# Altium PCB Dev Board.PcbDoc (part 2 of 2)
Units mm, origin at the board's own origin, x right, y up, seen from the top; angles counter-clockwise.
Board outline 100 x 100 mm, 4 copper layers (Top Layer, GND, 3V3, Bottom Layer), stack 0.603 mm thick; 110 components, 66 nets, 337 pads, 152 vias.
Unrouted connection lines stored in the file: 23.
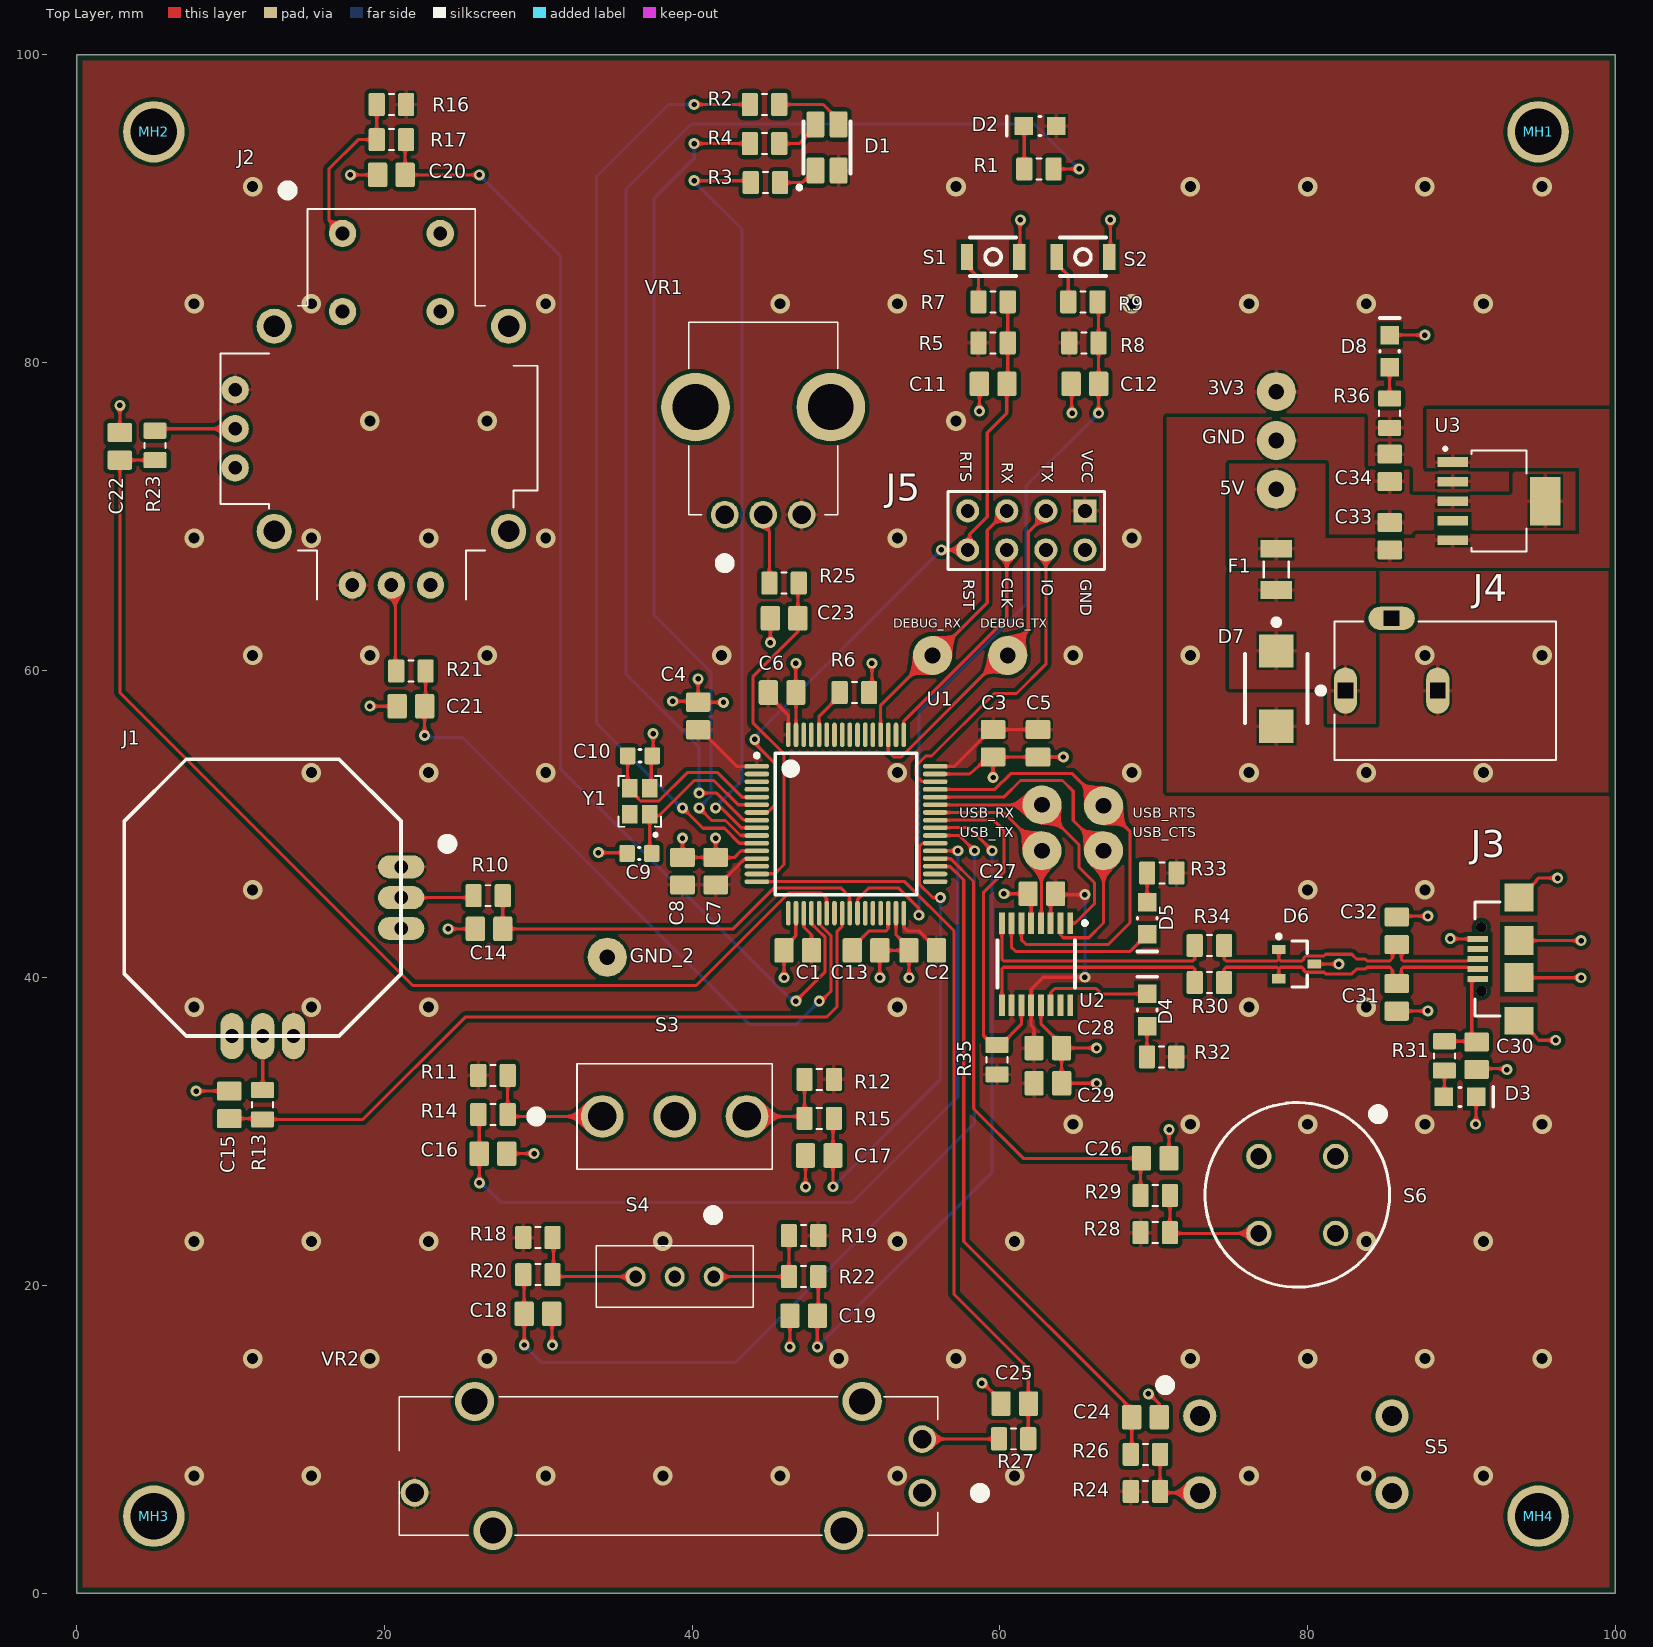
[diagram p0: Top Layer view]

## Part data (continued)
U2: Manufacturer 1="FTDI, Future Technology Devices International Ltd", Manufacturer Part Number 1=FT230XS-R, Supplier Part Number 1=768-1135-1-ND, Supplier 1=Digi-Key
U3: library part CMP-0395-00300-2, "IC REG LINEAR 3.3V 1A SOT223-6", Manufacturer="Texas Instruments", Rating=Catalog, Supplier Part Number 1=296-22681-2-ND, Accuracy(%)=3, DatasheetVersion=SBVS067O, Eco-Plan="Green (RoHS & no Sb/Br)", Fixed Output Options(V)=3.3, Iout(Max)(A)=1, Iq(Typ)(mA)=0.3, Manufacturer 1="Texas Instruments", Manufacturer Part Number 1=TPS73733DCQR, Mounting Technology="Surface Mount", PackageDescription="6-Pin Plastic Small Outline, Body 3.5 x 6.5 mm, Pitch 1.27 mm", PackageReference=DCQ0006A, PackageVersion=4202109/D, PartNumber=TPS73733DCQR, SubFamily="Single Channel LDO", Supplier 1=Digi-Key, Vdo(Typ)(mV)=130, Vin(Max)(V)=5.5, Vin(Min)(V)=2.2, Vout Adj(Max)(V)=3.3, Vout Adj(Min)(V)=3.3
VR1: "POT 10K OHM 1/20W CARBON LINEAR", Manufacturer 1=Bourns, Manufacturer Part Number 1=PTV09A-4020F-B103, Max Operating Temperature=50°C, Max Power Dissipation=50mW, Min Operating Temperature=-10°C, Package Quantity=100, Resistance=10kR, Supplier Part Number 1=PTV09A-4020F-B103-ND, Tolerance=20%, Voltage Rating=20V, Actuator Diameter=0.236inch, Actuator Length=0.787inch, ComponentLink1Description=https://datasheet.ciiva.com/6249/ptv09-6249579.pdf?src-supplier=Digi-Key, ComponentLink1URL=https://datasheet.ciiva.com/6249/ptv09-6249579.pdf?src-supplier=Digi-Key, ComponentLink2Description=https://datasheet.ciiva.com/11831/0900766b80fa58ec-11831036.pdf?src-supplier=RSComponents, ComponentLink2URL=https://datasheet.ciiva.com/11831/0900766b80fa58ec-11831036.pdf?src-supplier=RSComponents, ComponentLink3Description=https://datasheet.ciiva.com/6249/ptv09-6249723.pdf?src-supplier=Digi-Key, ComponentLink3URL=https://datasheet.ciiva.com/6249/ptv09-6249723.pdf?src-supplier=Digi-Key, ComponentLink4Description=https://datasheet.ciiva.com/30228/24ptv09-30228045.pdf?src-supplier=Onlinecomponents.com, ComponentLink4URL=https://datasheet.ciiva.com/30228/24ptv09-30228045.pdf?src-supplier=Onlinecomponents.com, Composition=Carbon, Depth=12.5mm, Length=11.4mm, Military Standard=Not, Mount="Through Hole,Snap in,Brackets", Number of Gangs=1, Number of Turns=1, Packaging=Bulk, Power Rating=50mW, Pricing 1="1=0.83000, 10=0.74400, 25=0.67200, 50=0.64800, 100=0.61200, 250=0.58800, 500=0.55200, 1000=0.45600, 5000=0.37200 (USD)", Radiation Hardening=No, REACH SVHC="No SVHC", RoHS=Yes, Stock 1=629, Supplier 1=Digi-Key, Taper=Linear, Termination=Pin, Type=Potentiometer, Voltage Rating (DC)=20V
VR2: "SLIDE POT 10K OHM 0.1W TOP 20MM", Manufacturer 1=Bourns, Manufacturer Part Number 1=PTA2043-2015DPB103, Max Operating Temperature=50°C, Max Power Dissipation=100mW, Min Operating Temperature=-10°C, Package Quantity=100, Power Rating=50mW, Resistance=10kR, Supplier Part Number 1=PTA2043-2015DPB103-ND, Tolerance=20%, ComponentLink1Description=https://datasheet.ciiva.com/6248/pta-6248511.pdf?src-supplier=Digi-Key, ComponentLink1URL=https://datasheet.ciiva.com/6248/pta-6248511.pdf?src-supplier=Digi-Key, Composition=Potentiometer, Depth=9mm, Height=0.256inch, Hole Diameter=1.2mm, Length=35mm, Military Standard=Not, Mount="Through Hole", Number of Turns=1, Packaging=Bulk, Pricing 1="1=1.29000, 10=1.14000, 25=1.02600, 50=0.98800, 100=0.95000, 250=0.89300, 500=0.76000, 1000=0.70300, 5000=0.57760 (USD)", Radiation Hardening=No, RoHS=Yes, Stock 1=927, Supplier 1=Digi-Key, Taper=Linear, Termination=Pin, Type=Potentiometer, Width=0.354inch
Y1: "CRYSTAL 25.0000MHZ 12PF SMD", Case/Package=SMD/SMT, ESR (Equivalent Series Resistance)=80R, Frequency=25MHz, Frequency Stability=15ppm, Frequency Tolerance=10ppm, Load Capacitance=12pF, Manufacturer 1="Kyocera AVX", Manufacturer Part Number 1=CX2520DB25000H0FLJC1, Max Operating Temperature=85°C, Min Operating Temperature=-30°C, Ratings=AEC-Q200, Supplier Part Number 1=1253-1724-1-ND, ComponentLink1Description=https://media.digikey.com/pdf/Data%20Sheets/AVX%20PDFs/CX2520DB_USY1M-H1-16429-00_Spec.pdf?src-supplier=Digi-Key, ComponentLink1URL=https://media.digikey.com/pdf/Data%20Sheets/AVX%20PDFs/CX2520DB_USY1M-H1-16429-00_Spec.pdf?src-supplier=Digi-Key, Height=0.022inch, Length=0.098inch, Mount="Surface Mount", Packaging="Tape and Reel", Pricing 1="1=0.72000, 10=0.63300, 50=0.59120, 100=0.52250, 500=0.49500, 1000=0.41250 (USD)", RoHS=Yes, Stock 1=11741, Supplier 1=Digi-Key, Width=0.079inch

## Via types
v1: diameter 1.27, hole 0.711, Top Layer to Bottom Layer, 81 vias
v2: diameter 0.711, hole 0.356, Top Layer to Bottom Layer, 71 vias

## Nets (pads, with @x,y where several pads share a name; then routed paths per layer and width w, separated by ;. In a path a pad name is that pad's centre, name@x,y a point inside that pad or via, vN(x,y) a via of type N, cw(c..) or ccw(c..) an arc to the next point about the centre after c; other vN are vias at no path point)
3V3: 3V3.1 C1.2 C2.2 C3.2 C4.2 C5.2 C6.2 C7.2 C8.2 C27.2 C28.2 C29.2 C34.2 D1.4 D2.1 J1.1 J1.4 J2.H1 J2.V1 J5.1 R5.2 R8.2 R11.1 R12.1 R16.1 R18.1 R19.1 R24.1 R28.1 R32.2 R33.2 R35.2 R36.2 U1.1 U1.13 U1.19 U1.32 U1.48 U1.64 U2.3 U2.10 U2.12 U3.2 VR1.3 VR2.3 | length 42.5
  Top Layer w0.203: R16.1@21.402,96.544 R16.1 ; C4.2@40.259,56.128 40.519,56.128 42.897,53.75 U1.1 ; C7.2 C7.2@41.656,46.038 ; C7.2@41.783,46.355 42.037,46.355 43.432,47.75 U1.13 ; C6.2 44.952,58.377 46.25,57.079 U1.64 ; U1.19 47.269,44.181 47.269,43.282 47.758,42.793 C1.2 ; U1.32 53.769,44.181 53.769,43.259 53.975,43.053 54.737,43.053 55.886,41.904 C2.2 ; U1.48 57.052,53.75 59.442,56.14 C3.2 ; C3.2@59.69,56.14 C5.2 C5.2@62.611,56.14 ; C28.2 62.224,36.709 62.035,36.898 U2.12 62.035,39.259 62.813,40.037 v2(65.532,40.037) ; U2.3 63.305,45.021 C27.2@63.622,45.338 ; C27.2 63.691,45.402 v2(65.532,45.402)
  Bottom Layer w0.203: v2(65.532,40.037) v2(65.532,45.402)
  other v1: 7.62,7.62 15.24,7.62 30.48,7.62 38.1,7.62 45.72,7.62 53.34,7.62 60.96,7.62 76.2,7.62 83.82,7.62 91.44,7.62 11.43,15.24 19.05,15.24 26.67,15.24 49.53,15.24 57.15,15.24 72.39,15.24 80.01,15.24 87.63,15.24 95.25,15.24 7.62,22.86 15.24,22.86 22.86,22.86 38.1,22.86 53.34,22.86 60.96,22.86 83.82,22.86 91.44,22.86 64.77,30.48 72.39,30.48 80.01,30.48 87.63,30.48 95.25,30.48 7.62,38.1 15.24,38.1 22.86,38.1 53.34,38.1 76.2,38.1 83.82,38.1 11.43,45.72 80.01,45.72 87.63,45.72 15.24,53.34 22.86,53.34 30.48,53.34 53.34,53.34 68.58,53.34 11.43,60.96 19.05,60.96 26.67,60.96 41.91,60.96 64.77,60.96 7.62,68.58 15.24,68.58 22.86,68.58 30.48,68.58 53.34,68.58 68.58,68.58 19.05,76.2 26.67,76.2 57.15,76.2 7.62,83.82 15.24,83.82 30.48,83.82 45.72,83.82 53.34,83.82 68.58,83.82 76.2,83.82 83.82,83.82 91.44,83.82 11.43,91.44 57.15,91.44 72.39,91.44 80.01,91.44 87.63,91.44 95.25,91.44
5V: 5V.1 C33.1 F1.2 U3.1 U3.5
DEBUG_RX: DEBUG_RX.1 J5.3 U1.52 | length 18.1
  Top Layer w0.203: U1.52 52.25,57.711 55.181,60.642 55.435,60.642 59.182,64.389 59.182,69.088 J5.3
DEBUG_TX: DEBUG_TX.1 J5.2 U1.51 | length 22
  Top Layer w0.203: U1.51@52.769,55.819 U1.51 52.75,54.692 53.086,54.356 53.594,54.356 60.071,60.833 61.849,62.611 61.849,68.961 62.992,70.104 J5.2
GND: C1.1 C2.1 C3.1 C4.1 C5.1 C6.1 C7.1 C8.1 C9.1 C10.1 C11.1 C12.1 C13.1 C14.1 C15.1 C16.1 C17.1 C18.1 C19.1 C20.1 C21.1 C22.1 C23.1 C24.1 C25.1 C26.1 C27.1 C28.1 C29.1 C30.2 C31.2 C32.2 C33.2 C34.1 D3.2 D6.3 D7.2 D8.2 GND.1 GND_2.1 J1.3 J1.6 J2.B2A J2.H3 J2.V3 J3.5 J3.Shell J4.2 J5.5 R6.2 S1.2 S2.2 S3.2 S4.2 S5.1 S6.1 U1.12 U1.18 U1.31 U1.47 U1.63 U2.5 U2.13 U3.3 U3.6 VR1.1 VR2.1 Y1.2 | length 121.9
  Top Layer w0.203: C22.1@2.794,75.444 v2@2.794,77.215 ; v2(7.746,32.638) C15.1 ; v2(17.78,92.202) C20.1 ; v2(19.049,57.657) C21.1@20.822,57.658 ; v2(24.129,43.179) C14.1@25.902,43.18 ; C16.1 v2(29.718,28.575) ; C18.1@30.891,18.137 30.891,16.152 v2(30.914,16.128) ; v2(33.909,48.133) 35.557,48.133 35.687,48.003 C9.1 ; Y1.2@37.305,52.387 Y1.2 37.241,52.514 37.338,52.611 37.338,54.424 37.481,54.424 37.465,54.44 v2(37.465,55.88) ; v2(38.735,57.978) 40.325,57.978 C4.1 ; v2(39.37,49.085) C8.1 C7.1 v2(41.529,49.085) ; v2(40.386,59.436) C4.1 ; C7.1@41.826,48.145 41.826,48.09 42.1,47.816 42.735,47.816 43.17,48.25 U1.12 ; v2(42.037,57.912) 40.634,57.912 40.507,58.039 C4.1 ; C23.1 45.021,63.315 45.085,63.252 v2(45.085,61.785) ; v2(45.974,40.005) 45.971,40.008 45.971,41.78 C1.1 45.968,41.953 46.736,42.721 46.736,44.186 U1.18 ; v2(46.354,16.001) C19.1 ; v2(46.736,60.452) 46.736,58.553 C6.1 46.75,58.539 U1.63 ; C17.1@47.368,28.445 47.368,26.418 v2(47.37,26.415) ; R6.2 51.689,58.735 v2(51.689,60.452) ; v2(52.197,40.005) C13.1 C2.1 ; U1.31 53.25,42.804 54.096,41.958 C2.1 ; v2(54.102,40.005) 54.099,40.008 54.099,41.78 C2.1 ; U1.47 58.039,53.25 59.26,54.35 C3.1 ; C11.1 58.671,78.61 58.671,76.838 v2(58.674,76.835) ; v2(58.833,13.652) 58.928,13.652 60.071,12.509 C25.1 ; v2(59.563,53.023) 59.563,54.096 59.436,54.223 C3.1 ; v2(60.261,45.466) 61.583,45.466 61.71,45.339 C27.1 ; S1.2 61.302,86.907 61.302,89.242 v2(61.34,89.28) ; U2.5 C27.1@62.035,45.338 ; U2.13 62.67,37.025 C28.1@64.014,35.681 ; C28.1@64.017,35.43 64.017,33.15 C29.1 v2(66.294,33.147) ; C28.1@64.017,35.433 v2(66.294,35.433) ; v2(64.135,54.356) 62.49,54.356 C5.1 C3.1 ; C12.1 64.671,78.579 64.671,76.742 v2(64.705,76.708) ; S2.2@67.105,86.418 S2.2 67.183,86.946 v2(67.183,89.281) ; v2(69.659,12.954) 69.723,12.954 70.364,12.313 C24.1 ; C26.1@70.996,28.266 71,28.27 v2(71,30.138) ; D6.3 D6.3 82.04,40.892 v2(82.041,40.893) ; D8.2 v2(87.63,81.788) ; C31.2@85.897,37.839 87.825,37.839 v2(87.831,37.845) ; C32.2@85.896,44.008 87.699,44.008 v2@87.705,44.002 ; v2(89.281,42.545) 89.295,42.531 91.061,42.531 J3.5 ; v2(90.932,30.48) 90.966,30.514 D3.2 ; C30.2@90.995,34.099 92.9,34.099 v2(92.964,34.036) ; J3.Shell@93.75,37.217 93.8,37.217 94.883,36.135 94.883,36.085 95.027,35.941 v2(96.139,35.941) ; J3.Shell@93.75,40.017 93.762,40.005 v2(97.79,40.005) ; J3.Shell@93.751,42.418 v2(97.79,42.418) ; J3.Shell@93.75,45.217 93.8,45.217 94.871,46.288 94.871,46.338 95.015,46.482 v2(96.266,46.482)
  other v1: 76.2,53.34 83.82,53.34 91.44,53.34 72.39,60.96 87.63,60.96 95.25,60.96
  other v2: 87.832,44.008 2.793,77.215
NetC9_2: C9.2 U1.6 Y1.1 | length 11.3
  Top Layer w0.203: C9.2 37.241,48.211 Y1.1 37.241,50.724 37.419,50.546 37.846,50.546 40.132,52.832 41.402,52.832 42.984,51.25 U1.6
NetC10_2: C10.2 U1.5 Y1.3 | length 12.3
  Top Layer w0.203: C10.2 35.806,52.459 Y1.3 35.941,52.224 36.512,51.653 36.512,51.629 36.646,51.495 37.836,51.495 39.68,53.34 41.656,53.34 43.265,51.731 44.181,51.731 U1.5
NetC13_2: C13.2 U1.30 | length 4
  Top Layer w0.203: C13.2 50.407,41.953 51.507,43.053 52.615,43.053 52.731,43.17 52.731,44.181 U1.30
NetC14_2: C14.2 R10.2 U1.25 | length 27.1
  Top Layer w0.203: R10.2 27.686,43.186 C14.2 42.672,43.18 45.339,45.847 49.657,45.847 50.231,45.273 50.231,44.219 U1.25
NetC15_2: C15.2 R13.2 U1.24 | length 48.8
  Top Layer w0.203: C15.2 12.011,30.849 R13.2 18.603,30.795 25.273,37.465 30.861,37.465 48.768,37.465 49.403,38.1 49.403,42.997 49.75,43.344 U1.24 U1.24@49.731,44.219
NetC16_2: C16.2 R14.2 U1.37 | length 56.4
  Top Layer w0.203: R14.2 26.156,31.055 C16.2 26.162,28.569 v2(26.162,26.67) ; U1.37 55.81,48.26 v2(57.268,48.26)
  Bottom Layer w0.203: v2(26.162,26.67) 26.289,26.67 27.559,25.4 50.419,25.4 57.268,32.249 v2(57.268,48.26)
NetC17_2: C17.2 R15.2 U1.38 | length 31.1
  Top Layer w0.203: 49.155,26.796 C17.2 49.155,30.801 R15.2 ; U1.38 54.973,48.75 54.771,48.548 54.771,46.093 55.653,45.212 v2(56.134,45.212)
  Bottom Layer w0.203: v2(49.155,26.416) 56.134,33.395 v2(56.134,45.212)
NetC18_2: C18.2 R20.2 U1.39 | length 61.5
  Top Layer w0.203: R20.2 29.077,20.641 C18.2 29.083,18.155 v2(29.083,16.129) ; U1.39 57.366,49.251 v2(58.356,48.26)
  Bottom Layer w0.203: v2(29.083,16.129) 30.226,14.986 42.799,14.986 58.356,30.543 v2(58.356,48.26)
NetC19_2: C19.2 R22.2 U1.40 | length 45.9
  Top Layer w0.203: v2(48.133,16.002) 48.133,18.022 C19.2 48.199,18.088 R22.2 ; U1.40 55.817,49.767 57.993,49.767 v2(59.499,48.26)
  Bottom Layer w0.203: v2(48.133,16.002) 59.499,27.368 v2(59.499,48.26)
NetC20_2: C20.2 R17.2 U1.20 | length 76.4
  Top Layer w0.203: R17.2 21.342,94.428 C20.2 v2(26.162,92.202) ; v2(46.736,38.481) 48.641,40.386 48.641,42.633 48.102,43.171 48.093,43.171 47.75,43.515 U1.20
  Bottom Layer w0.203: v2(26.162,92.202) 31.432,86.931 31.433,53.594 46.545,38.481 v2(46.736,38.481)
NetC21_2: C21.2 R21.2 U1.21 | length 44.9
  Top Layer w0.203: v2(22.606,55.753) 22.606,57.906 22.672,57.972 R21.2 22.672,60.005 R21.2@22.606,60.071 ; U1.21 48.25,43.524 48.371,43.402 48.371,43.393 49.022,42.743 49.022,39.116 48.387,38.481 v2(48.26,38.481)
  Bottom Layer w0.203: v2@22.479,55.626 25.082,55.626 43.752,36.957 46.736,36.957 v2(48.26,38.481)
NetC22_2: C22.2 R23.2 U1.22 | length 74.8
  Top Layer w0.203: R23.2 5.074,73.654 C22.2 2.794,58.547 21.844,39.497 40.259,39.497 46.279,45.517 48.387,45.517 48.731,45.172 48.731,44.219 U1.22
NetC23_2: C23.2 R25.2 U1.15 | length 22.4
  Top Layer w0.203: U1.15 44.219,46.769 45.372,46.769 45.974,47.371 45.974,54.561 43.942,56.593 43.942,59.563 46.869,62.49 C23.2 46.869,65.599 R25.2
NetC24_2: C24.2 R26.2 U1.35 | length 44.5
  Top Layer w0.203: U1.35@55.473,47.231 55.499,47.205 55.544,47.25 U1.35 55.819,47.231 56.782,47.231 57.658,46.355 57.658,22.86 68.574,11.944 C24.2 68.574,9.128 68.469,9.023 R26.2
NetC25_2: C25.2 R27.2 U1.16 | length 49.5
  Top Layer w0.203: U1.16 53.826,46.25 57.023,43.053 57.023,19.431 61.849,14.605 61.849,12.331 C25.2 ; C25.2@61.751,12.336 61.849,12.238 R27.2 ; R27.2@61.783,10.033 R27.2@61.783,10.329
NetC26_2: C26.2 R29.2 U1.36 | length 32.6
  Top Layer w0.203: U1.36 56.806,47.75 58.293,46.263 58.293,31.496 61.526,28.263 C26.2 69.149,28.203 R29.2
NetD1_1: D1.1 R3.2 | length 2.8
  Top Layer w0.203: R3.2 47.149,91.694 48.031,92.575 D1.1@48.031,92.655
NetD1_2: D1.2 R4.1 | length 2.9
  Top Layer w0.203: R4.1 46.959,94.234 47.702,94.977 47.782,94.977 48.031,95.225 D1.2@48.031,95.305
NetD1_3: D1.3 R2.1 | length 4.7
  Top Layer w0.203: R2.1 48.514,96.774 49.257,96.031 49.257,95.633 49.506,95.385 D1.3@49.506,95.305
NetD2_2: D2.2 R1.2 | length 2.8
  Top Layer w0.203: D2.2 61.59,95.348 R1.2
NetD3_1: D3.1 R31.1 | length 1.7
  Top Layer w0.203: D3.1 88.9,32.292 R31.1
NetD4_1: D4.1 R32.1 | length 2
  Top Layer w0.203: R32.1 D4.1@69.561,36.84
NetD4_2: D4.2 U2.14 | length 7.3
  Top Layer w0.203: U2.14 63.305,39.048 63.562,39.305 66.258,39.305 66.604,38.958 D4.2
NetD5_1: D5.1 R33.1 | length 1.9
  Top Layer w0.203: R33.1 69.58,46.811 D5.1
NetD5_2: D5.2 U2.7 | length 11
  Top Layer w0.203: U2.7 60.75,43.545 60.75,41.993 61.023,41.719 68.472,41.719 D5.2
NetD7_1: D7.1 F1.1 J4.1
NetD8_1: D8.1 R36.1 | length 2
  Top Layer w0.203: R36.1 D8.1
NetJ1_2: J1.2 R10.1 | length 4.7
  Top Layer w0.203: J1.2 25.649,45.212 R10.1
NetJ1_5: J1.5 R13.1 | length 3.5
  Top Layer w0.203: R13.1 12.082,32.722 J1.5
NetJ2_B1A: J2.B1A R16.2 R17.1 | length 10.7
  Top Layer w0.203: J2.B1A 16.383,89.281 16.383,92.583 18.288,94.488 R17.1 R16.2
NetJ2_H2: J2.H2 R21.1 | length 5.7
  Top Layer w0.203: J2.H2 20.701,65.278 20.701,60.005 R21.1
NetJ2_V2: J2.V2 R23.1 | length 5.3
  Top Layer w0.203: R23.1 5.202,75.692 J2.V2
NetR6_1: R6.1 U1.60 | length 3.3
  Top Layer w0.203: U1.60 48.25,57.013 49.591,58.354 R6.1
NetR9_2: R9.2 S2.1 | length 3.5
  Top Layer w0.203: S2.1 63.705,86.418 64.45,85.673 R9.2 64.516,83.947 R9.2@64.516,84.111
NetR11_2: R11.2 R14.1 S3.1 | length 8.7
  Top Layer w0.203: R11.2 R14.1 28.133,30.988 S3.1
NetR12_2: R12.2 R15.1 S3.3 | length 6.3
  Top Layer w0.203: S3.3 47.178,30.988 R15.1 R12.2
NetR18_2: R18.2 R20.1 S4.3 | length 7.9
  Top Layer w0.203: R18.2 30.988,23.053 30.988,20.762 R20.1 31.054,20.574 S4.3
NetR19_2: R19.2 R22.1 S4.1 | length 7.6
  Top Layer w0.203: S4.1 R22.1 R19.2
NetR24_2: R24.2 R26.1 S5.3 | length 5
  Top Layer w0.203: R26.1 R24.2 70.511,6.522 S5.3
NetR25_1: R25.1 VR1.2 | length 4.6
  Top Layer w0.203: VR1.2 44.639,70.082 44.639,69.407 45.019,69.027 R25.1
NetR27_1: R27.1 VR2.2 | length 4.8
  Top Layer w0.203: VR2.2 59.648,10.014 R27.1@59.69,9.972
NetR28_2: R28.2 R29.1 S6.3 | length 8.2
  Top Layer w0.203: R29.1 R28.2 71.106,23.39 S6.3
NetR35_1: R35.1 U1.41 U2.11 | length 23.2
  Top Layer w0.203: U1.41 59.605,50.25 60.261,49.593 60.261,46.863 58.928,45.529 58.928,36.258 59.561,35.626 R35.1 60.047,35.626 61.4,36.979 U2.11
NetTP6_1: U1.42 U2.4 USB_TX.1 | length 13.3
  Top Layer w0.203: U1.42 60.248,50.75 62.492,48.506 62.492,48.438 62.704,48.226 62.704,43.595 U2.4 ; USB_TX.1@62.928,48.704 63.182,48.45 USB_TX.1@62.992,48.26
NetTP7_1: U1.43 U2.1 USB_RX.1 | length 16.9
  Top Layer w0.203: U1.43 55.803,51.247 62.735,51.247 62.735,51.057 65.151,48.641 65.151,47.18 66.167,46.164 66.167,44.831 64.896,43.56 U2.1
NetTP9_1: U1.44 U2.2 USB_CTS.1 | length 23.1
  Top Layer w0.203: U1.44@55.781,51.75 U1.44 60.259,51.75 61.341,52.832 64.072,52.832 64.77,52.133 64.77,50.228 USB_CTS.1 66.739,43.561 65.786,42.608 64.135,42.608 63.94,42.804 U2.2
NetTP10_1: U1.45 U2.6 USB_RTS.1 | length 30.7
  Top Layer w0.203: U1.45 59.679,52.25 60.706,53.276 64.706,53.276 66.23,51.752 USB_RTS.1@66.421,51.752 ; U2.6 61.4,42.486 61.722,42.164 67.056,42.164 68.453,43.561 68.453,49.53 USB_RTS.1@66.739,51.244 ; USB_RTS.1@66.802,51.181 USB_RTS.1@66.961,51.022 ; USB_RTS.1@67.12,50.102 USB_RTS.1@67.12,50.863 ; USB_RTS.1@66.961,51.022 66.802,50.863 USB_RTS.1@67.12,50.863 ; USB_RTS.1@66.961,51.022 USB_RTS.1@67.12,50.863
nLED: R1.1 U1.8 | length 79.8
  Top Layer w0.203: v2(40.45,52.006) 41.593,52.006 43.33,50.269 44.181,50.269 U1.8 ; R1.1 63.545,92.583 v2(65.151,92.583)
  Bottom Layer w0.203: v2(40.45,52.006) 40.45,54.991 35.687,59.753 35.687,91.249 39.941,95.504 62.23,95.504 v2(65.151,92.583)
nLED_B: R2.2 U1.11 | length 61.1
  Top Layer w0.203: v2(39.37,51.054) 40.703,49.721 42.1,49.721 43.071,48.75 U1.11 ; v2(40.132,96.774) R2.2
  Bottom Layer w0.203: v2(39.37,51.054) 39.287,51.054 33.782,56.559 33.782,92.075 38.481,96.774 v2(40.132,96.774)
nLED_G: R4.2 U1.10 | length 54.2
  Top Layer w0.203: v2(40.132,94.234) R4.2 ; v2(40.45,51.054) 41.275,50.228 42.164,50.228 43.142,49.25 U1.10
  Bottom Layer w0.203: v2(40.132,94.234) 40.132,93.281 37.529,90.678 37.529,63.563 41.212,59.88 41.212,51.816 v2(40.45,51.054)
nLED_R: R3.1 U1.9 | length 49.8
  Top Layer w0.203: v2(40.132,91.821) 43.384,91.821 43.638,91.567 43.765,91.694 R3.1 ; v2(41.529,51.054) 41.886,51.054 43.191,49.75 U1.9
  Bottom Layer w0.203: v2(40.132,91.821) 40.132,91.757 43.246,88.644 43.246,52.834 41.529,51.117 v2(41.529,51.054)
nRESET: C11.2 J5.8 R5.1 R7.2 U1.7 | length 42.5
  Top Layer w0.203: v2(44.069,55.499) 44.069,55.245 45.402,53.911 45.402,51.267 45.007,50.871 44.998,50.871 44.876,50.75 U1.7 ; v2(56.197,67.818) J5.8 58.039,67.945 58.039,68.834 59.182,69.977 59.182,75.438 60.452,76.708 60.452,78.607 C11.2 60.518,78.673 R5.1 R7.2
  Bottom Layer w0.203: v2(44.069,55.499) 44.069,55.689 v2(56.197,67.818)
nRESET_R: R7.1 S1.1 | length 3.2
  Top Layer w0.203: S1.1 57.863,86.282 58.608,85.537 R7.1
nTEST_BTN: C12.2 R8.1 R9.1 U1.26 | length 51.7
  Top Layer w0.203: U1.26@50.75,44.876 U1.26 50.736,44.213 50.736,45.085 51.498,45.847 53.404,45.847 54.737,44.514 v2(54.737,44.069) ; R9.1 66.421,83.886 R8.1 66.427,81.274 C12.2 66.548,78.492 66.421,78.365 v2(66.421,76.708)
  Bottom Layer w0.203: v2(54.737,44.069) 54.737,57.301 61.722,64.286 61.722,72.009 v2(66.421,76.708)
SWD_CLK: J5.7 U1.49 | length 14.8
  Top Layer w0.203: U1.49 53.75,56.671 60.452,63.373 J5.7
SWD_IO: J5.6 U1.46 | length 20.7
  Top Layer w0.203: U1.46 55.781,52.769 54.927,52.769 54.546,53.149 54.546,53.785 55.181,54.419 55.562,54.419 59.627,58.483 61.087,58.483 62.992,60.389 62.992,67.691 J5.6
USB_5V: C30.1 J3.1 R31.2 | length 6.5
  Top Layer w0.203: R31.2 90.922,35.88 90.932,35.89 90.678,36.144 90.678,39.776 90.82,39.917 J3.1
USBD_N: R30.2 U2.9 | length 15.9
  Top Layer w0.203: U2.9 60.13,40.571 60.249,40.69 64.751,40.69 ; 64.752,40.69 72.551,40.69 72.67,40.571 R30.2
USBD_P: R34.2 U2.8 | length 16
  Top Layer w0.203: U2.8 60.13,41.216 60.249,41.097 64.92,41.097 ; 64.752,41.096 64.812,41.096 64.92,41.096 72.551,41.096 72.67,41.215 R34.2
USBD_R_N: C31.1 D6.2 J3.2 R30.1 | length 21.8
  Top Layer w0.203: R30.1 74.58,40.571 74.7,40.69 75.749,40.69 ; 76.561,40.69 75.749,40.69 ; D6.2 78.138,40.568 ; J3.2 90.977,40.666 90.406,40.666 90.383,40.689 86.793,40.689 86.791,40.691 86.225,40.691 86.106,40.572 86.106,39.243 86.054,39.243 85.533,39.765 85.533,40.502 85.344,40.691 83.876,40.691 83.747,40.562 83.185,40.562 82.882,40.259 81.178,40.259 81.075,40.362 79.893,40.362 79.759,40.496 79.759,40.568 79.64,40.687 78.257,40.687 78.138,40.568 ; 75.749,40.69 75.751,40.687 78.019,40.687 78.138,40.568
USBD_R_P: C32.1 D6.1 J3.3 R34.1 | length 21.8
  Top Layer w0.203: R34.1 74.58,41.215 74.7,41.096 75.917,41.096 ; 76.729,41.096 75.917,41.096 ; D6.1 78.138,41.213 ; J3.3 90.977,41.119 90.406,41.119 90.383,41.096 86.961,41.096 86.959,41.097 86.225,41.097 86.106,41.216 86.106,42.545 86.054,42.545 85.533,42.023 85.533,41.286 85.344,41.097 83.878,41.097 83.749,41.226 83.185,41.226 82.882,41.529 81.185,41.529 81.075,41.419 79.893,41.419 79.759,41.285 79.759,41.213 79.64,41.094 78.257,41.094 78.138,41.213 ; 75.917,41.096 75.919,41.094 78.019,41.094 78.138,41.213
pads on no net: J2.B1B J2.B2B J2.S1 J2.S2 J2.S3 J2.S4 J3.4 J3.MH1 J3.MH2 J4.3 J5.4 MH1.0 MH2.0 MH3.0 MH4.0 S5.2 S5.4 S6.2 S6.4 U1.2 U1.3 U1.4 U1.14 U1.17 U1.23 U1.27 U1.28 U1.29 U1.33 U1.34 U1.50 U1.53 U1.54 U1.55 U1.56 U1.57 U1.58 U1.59 U1.61 U1.62 U2.15 U2.16 U3.4 VR1.4 VR1.5 VR2.4 VR2.5 VR2.6 VR2.7 Y1.4

## Polygon pours and split planes (outlines as drawn)
3V3 on 3V3 "3V3-No Net" (solid, pour order 22): 0,103.378 8.128,103.378 102.87,103.378 102.87,0 0,0
GND on GND "GND-No Net" (solid, pour order 24): 0,102.362 102.108,102.362 102.108,0 0,0
3V3 on Top Layer "Top Layer-3V3 1" (solid, pour order 56): 0,101.727 103.124,101.727 103.124,15.494 103.124,0 0,0
3V3 on Top Layer "Top Layer-3V3" (solid, pour order 52): 76.327,76.581 76.327,79.756 79.629,79.756 79.629,76.962 83.947,76.962 83.947,76.581
GND on Top Layer "Top Layer-No Net 1" (solid, pour order 50): 84.709,66.929 99.568,66.929 99.568,52.07 70.866,52.07 70.866,76.454 83.82,76.454 83.82,73.152 86.741,73.152 86.741,71.501 93.218,71.501 93.345,71.628 93.345,73.025 97.536,73.025 97.536,68.961 90.678,68.961 90.678,70.231 88.265,70.231 88.265,68.961 86.868,68.961 86.868,68.707 81.28,68.707 81.28,73.533 74.803,73.533 74.803,58.674 81.153,58.674 81.026,58.547 81.026,56.388 84.709,56.388
3V3 on Top Layer "Top Layer-3V3" (solid, pour order 40): 83.947,76.962 83.947,73.279 86.868,73.279 86.868,71.628 93.091,71.628 93.091,73.025 87.63,73.025 87.63,76.962
5V on Top Layer "Top Layer-5V" (solid, pour order 30): 74.93,73.406 81.153,73.406 81.153,68.58 86.995,68.58 86.995,68.834 97.663,68.834 97.663,73.152 87.757,73.152 87.757,76.962 100,76.962 100,66.675 87.249,66.675 74.93,66.675
NetD7_1 on Top Layer "Top Layer-NetD7_1" (solid, pour order 28): 84.455,56.515 84.455,60.96 84.455,66.421 74.803,66.421 74.93,66.294 74.93,58.801 81.28,58.801 81.28,56.515
GND on Bottom Layer "Bottom Layer-No Net" (solid, pour order 26): 0,104.648 105.664,104.648 105.664,0 0,0

## Silkscreen, mask and mechanical layers (free items; w line width, h text height)
Mechanical 2:
  the board outline again, w0.254

## Text inside footprints (layer, text, board x,y; h text height)
J3: Mechanical 2 "PCB Edge" at 95.85,40.017 h0.41 r90
J5: Top Overlay "TX" at 62.732,73.51 h0.76 r270; Top Overlay "RX" at 60.132,73.51 h0.76 r270; Top Overlay "RTS" at 57.432,74.237 h0.76 r270; Top Overlay "IO" at 62.732,65.912 h0.76 r270; Top Overlay "CLK" at 60.132,66.012 h0.76 r270; Top Overlay "RST" at 57.612,65.912 h0.76 r270; Top Overlay "VCC" at 65.332,74.312 h0.76 r270; Top Overlay "GND" at 65.232,65.912 h0.76 r270